# Altium PCB contor.PcbDoc
Units mm, origin at the board's own origin, x right, y up, seen from the top; angles counter-clockwise.
Board outline 151 x 86.38 mm, 2 copper layers (Top Layer, Bottom Layer); 14 components, 30 nets, 69 pads, 0 vias.
Unrouted connection lines stored in the file: 5.
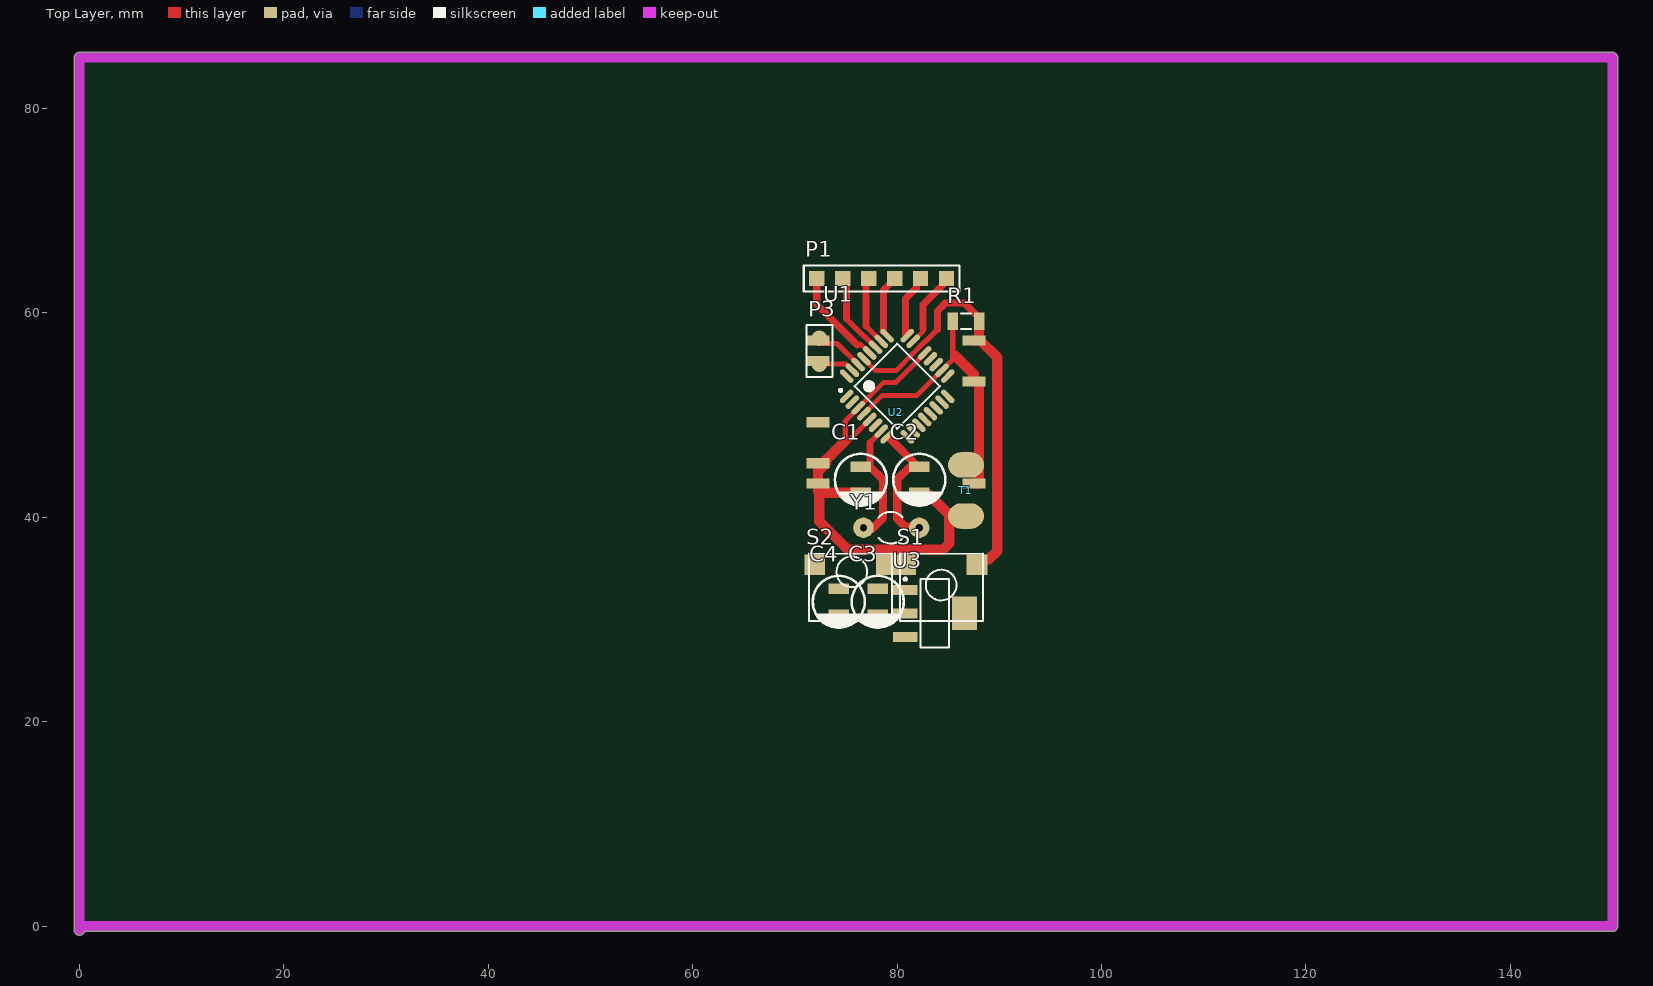
[diagram p0: Top Layer view]
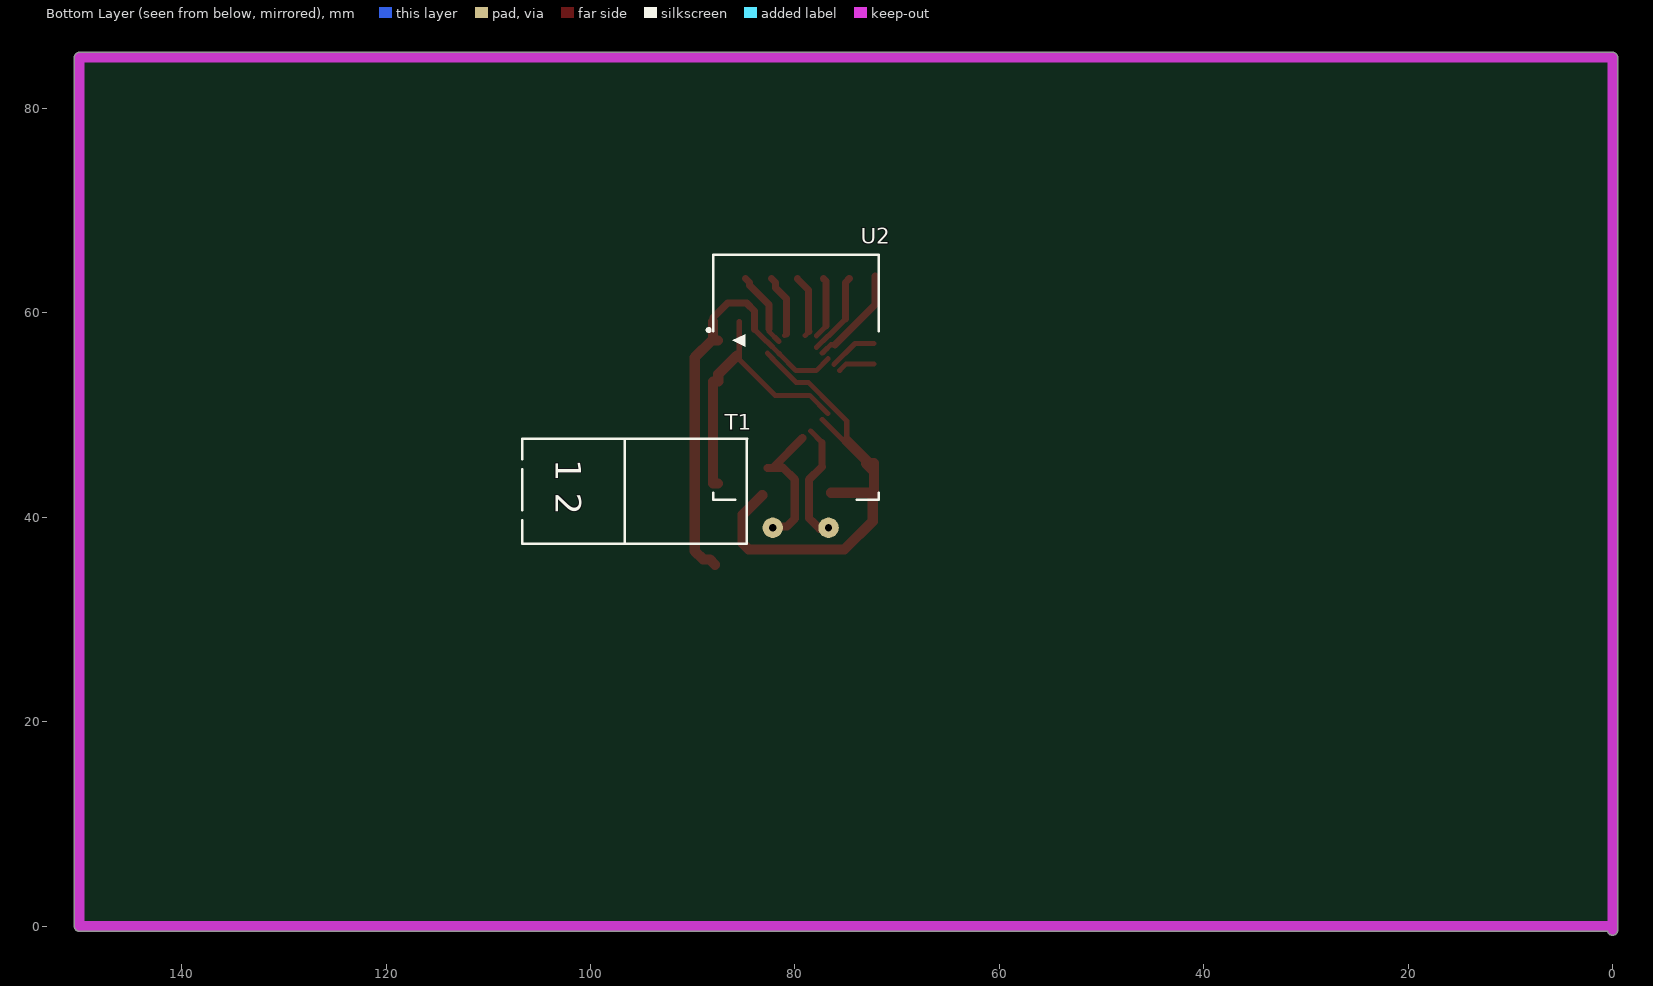
[diagram p1: Bottom Layer view, seen from below]
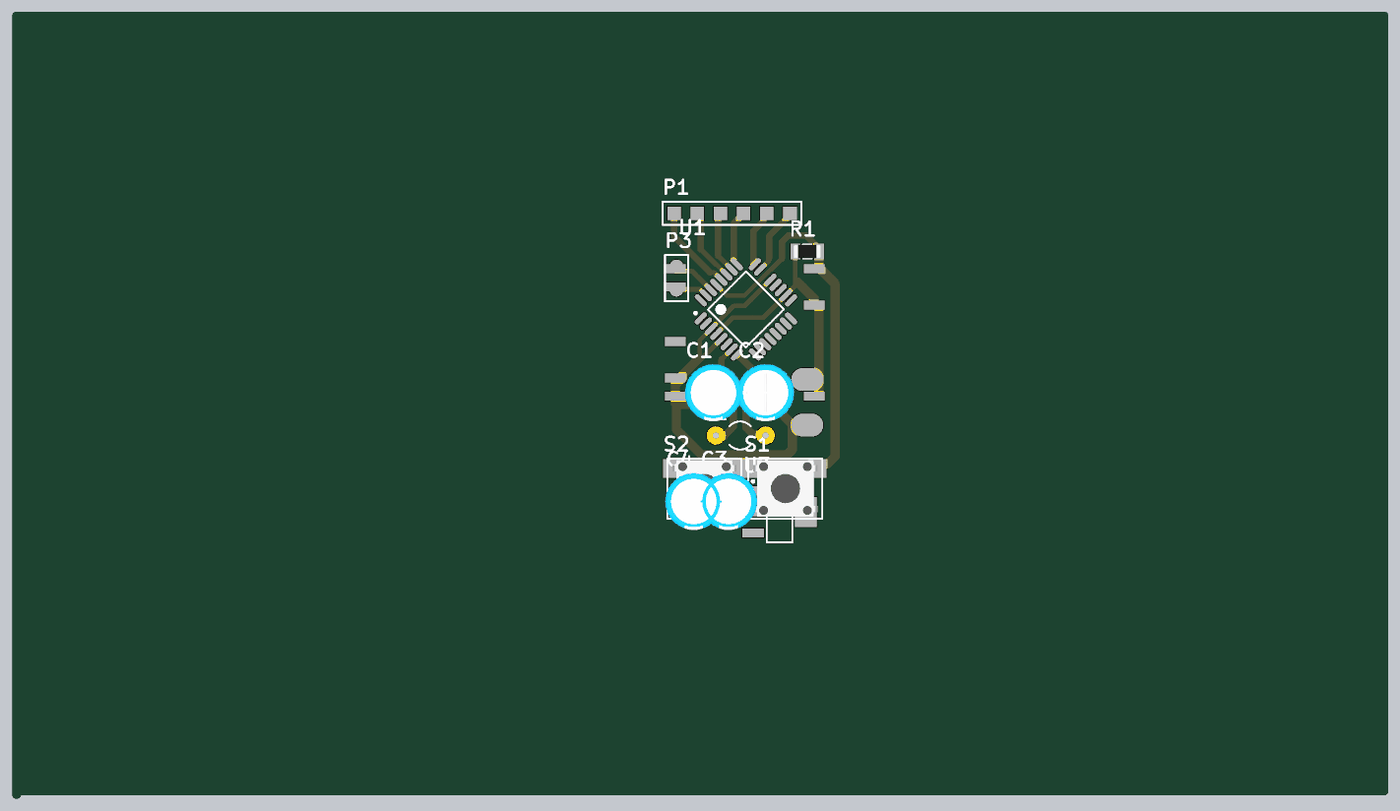
[diagram p2: 3D render of the assembled board from above, using the file's embedded part models]

## Layer stack, top to bottom
Top Solder: solder mask 0.0102, Solder Resist, Dk 3.5
Top Layer: signal copper 0.0356
Dielectric 1: dielectric 0.32, FR-4, Dk 4.8
Bottom Layer: signal copper 0.0356
Bottom Solder: solder mask 0.0102, Solder Resist, Dk 3.5

## Board outline
-0.5,-0.381 -0.5,85 cw(c0,85) 0,85.5 150,85.5 cw(c150,85) 150.5,85 150.5,0 cw(c150,0) 150,-0.5 0.486,-0.5 cw(c0,-0.381)

## Design rules (kind name [scope] priority, off if disabled: settings)
Clearance Clearance_1 [InPolygon] p1: gap=0.8 ignorepadtopadclearanceinfootprint=FALSE
Clearance [All] p2: gap=0.254 ignorepadtopadclearanceinfootprint=FALSE except(0: Arc-Hole Track-Hole SMDPad-Hole THPad-Hole Via-Hole Fill-Hole Poly-Hole Region-Hole Text-Hole)
DiffPairsRouting [All] p1: maxlimit=0.254 minlimit=0.8 mostfreqgap=0.254 toplayer_minwidth=0.381 toplayer_maxwidth=0.381 toplayer_prefwidth=0.381 bottomlayer_minwidth=0.381 bottomlayer_maxwidth=0.381 bottomlayer_prefwidth=0.381 maxuncoupledlength=12.7
PolygonConnect [All] p1: connectstyle=Relief reliefconductorwidth=0.254 reliefentries=4 polygonreliefangle="90 Angle" airgapwidth=0.254
RoomDefinition contor [InComponentClass('contor')] p1: confinementstyle=ConfineIn formatcopy=TRUE lockcomponents=FALSE outline 144.907,-4.953 247.904,-4.953 247.904,23.114 144.907,23.114
RoutingLayers [All] p1: top layer_v5=FALSE bottom layer_v5=TRUE
RoutingVias [All] p1: holewidth=0.711 width=2.5 viastyle="Through Hole" minholewidth=0.711 minwidth=1.27 maxholewidth=0.711 maxwidth=2
SolderMaskExpansion [All] p1: expansion=0.102 istentingtop=FALSE
Width [All] p1: maxlimit=3 minlimit=0.5 preferedwidth=1
28 further rules are at their usual default settings.

## Components (designator, comment, footprint, x,y, rotation, side; value= is the part's Value field where it differs from the comment)
C1 "=Value" ELEC-CAP-RAD10-20 76.454,43.688 r90 top
C2 "=Value" ELEC-CAP-RAD10-20 82.169,43.688 r90 top
C3 "=Value" ELEC-CAP-RAD10-20 78.105,31.75 r90 top (schematic designator C2)
C4 "=Value" ELEC-CAP-RAD10-20 74.295,31.75 r90 top (schematic designator C2)
P1 "Header 6" HDR1X6 84.836,63.373 r180 top
P3 "Header 2" HDR1X2 72.39,54.991 r90 top
R1 "10K" "RES 1206 (3216X08L)" 86.741,59.182 r180 top
S1 "PUSH BUTTON DOUBLE" "PUSH BUTTON" 84.328,33.147 r0 top
S2 "PUSH BUTTON DOUBLE" "PUSH BUTTON" 75.438,33.147 r0 top
T1 "Phoenix terminal" "phoenix terminal R 2" 106.68,47.705 r270 bottom
U1 "ATmega8-16AC" 32A_N 80.01,52.832 r45 top
U2 "ESP_12_E" ESP_12_E 87.888,57.307 r180 bottom
U3 "LM1117MP-3.3" MP04A_N 83.693,30.607 r0 top
Y1 "XTAL" R38 79.375,38.989 r270 top

## Footprints (in the part's own frame and the unit in brackets; to place one, negate y for a bottom-side part, rotate by r counter-clockwise, add the part's x,y. Pads: shape width x height; smd on the part's side, far side on the other; paste and mask are expansions set on the pad)
32A_N [mm] "Thin QFP, 32-Leads, Body 7x7mm, Pitch 0.8mm, IPC Medium Density"
  oval 1.65x0.55 smd: 1(-4.2,2.8) 2(-4.2,2) 3(-4.2,1.2) 4(-4.2,0.4) 5(-4.2,-0.4) 6(-4.2,-1.2) 7(-4.2,-2) 8(-4.2,-2.8) 17(4.2,-2.8) 18(4.2,-2) 19(4.2,-1.2) 20(4.2,-0.4) 21(4.2,0.4) 23(4.2,2) 24(4.2,2.8)
  oval 0.55x1.65 smd: 9(-2.8,-4.2) 10(-2,-4.2) 11(-1.2,-4.2) 12(-0.4,-4.2) 13(0.4,-4.2) 14(1.2,-4.2) 15(2,-4.2) 16(2.8,-4.2) 25(2.8,4.2) 26(2,4.2) 27(1.2,4.2) 28(0.4,4.2) 29(-0.4,4.2) 30(-1.2,4.2) 31(-2,4.2) 32(-2.8,4.2)
  silkscreen extent -4.32,-2.95 2.95,3.75, body extent -3.5,-3.5 3.5,3.5, height 1.2
ELEC-CAP-RAD10-20 [mm]
  rect 1x2 smd: 1(-1.27,0) 2(1.27,0)
  silkscreen extent -2.54,-2.54 2.54,2.54, body extent -3.15,-3.15 3.15,3.15, height 10.26
ESP_12_E [mm] "ESP-12 Wi-Fi Module by AI-Thinker"
  rect 2.25x1 smd far side: 1(0.375,0) 3(0.375,-4) 8(0.375,-14) 15(15.625,-14) 16(15.625,-12) 18(15.625,-8) 21(15.625,-2) 22(15.625,0)
  silkscreen extent -0.7,-15.57 16.08,8.37, body extent 0,-15.49 16,8.51, height 2.75
HDR1X2 [mm] "Connector; Header; 2 Position"
  round 1.5 smd: 1(0,0) 2(2.54,0)
  silkscreen extent -1.27,-1.27 3.81,1.27
HDR1X6 [mm] "Connector; Header; 6 Position"
  rect 1.5x1.5 smd: 1(0,0) 2(2.54,0) 3(5.08,0) 4(7.62,0) 5(10.16,0) 6(12.7,0)
  silkscreen extent -1.27,-1.27 13.97,1.27
MP04A_N [mm] "SOT223, 4-Leads, Body 6.5x3.5mm, Pitch 2.3mm, Lead Span 7mm, IPC Medium Density"
  rect 2.4x1 smd: 1(-2.9,2.3) 2(-2.9,0) 3(-2.9,-2.3)
  rect 2.4x3.3 smd: 4(2.9,0)
  silkscreen extent -3.02,-3.35 1.4,3.47, body extent -1.85,-3.35 1.85,3.35, height 1.8
"phoenix terminal R 2" [mm] "2 Right terminals"
  oval 2.5x3.5 smd far side: 1(2.573,19.939) 2(7.573,19.939)
  silkscreen extent 0,0 10.29,22
"PUSH BUTTON" [mil]
  rect 80x80 smd: 1(-137.5,87.5) 2(137.5,87.5)
  silkscreen extent -160,-130 160,130, body extent -155,-121 157,123, height 205
R38 [mm] "Crystal, Thru-Hole; 2 Leads; Body 3.1 x 8.2 mm (Dia.xH)"
  round 2 hole 0.7: 1(0,2.794) 2(0,-2.667)
  silkscreen extent -1.55,-1.19 1.55,1.17
"RES 1206 (3216X08L)" [mm] "Chip Resistor, 2-Leads, Body 3.2x1.6mm, IPC High Density _ (0.125 W)"
  rect 1.05x1.7 smd: 1(-1.295,0) 2(1.301,0)
  silkscreen extent -0.5,-0.75 0.5,0.75, body extent -1.52,-0.76 1.53,0.76, height 0.6

## Part data
C1 C2 C3 C4: library part "Capacitor Electrolytic", "Electrolytic Capacitor"
P1: "Header, 6-Pin", LatestRevisionDate=17-Jul-2002, LatestRevisionNote="Re-released for DXP Platform.", Publisher="Altium Limited"
P3: "Header, 2-Pin", LatestRevisionDate=17-Jul-2002, LatestRevisionNote="Re-released for DXP Platform.", Publisher="Altium Limited"
R1: library part Resistor, "Resistor", Power="1/4 W", Tolerance=5%
S1 S2: "Switch"
T1: library part "Phoenix terminal R 2", "Right Terminal 2 Pin", ComponentLinkURL=www.picpars.com, Designer="Seyed Mohsen Ghasemain", E-mail=picpars@gmail.com
U1: "8-Bit AVR Microcontroller with 8K Bytes of In-System Programmable Flash Memory", Supplier Part Number 1=ATMEGA8-16AC-ND, Code_JEDEC=MS-026-ABA, ComponentLink1Description=Datasheet, ComponentLink1URL=http://www.atmel.com/dyn/resources/prod_documents/doc2486.pdf, ComponentLink2Description="Atmel.com Home", ComponentLink2URL=http://www.atmel.com, DatasheetVersion=2486H-AVR-09/02, LatestRevisionDate=16-Oct-2006, LatestRevisionNote="IPC-7351 Footprint Added.", PackageDescription="32-Lead, 7x7x1.0 mm Body, 0.8mm Lead Pitch, Thin Profile Plastic Quad Flat Package (TQFP)", PackageReference=32A, PackageVersion="revB, Oct-2001", Published=17-Sep-2003, Publisher="Altium Limited", Supplier 1=Digi-Key, Supplier 2=Mouser, Supplier Part Number 2=556-ATMEGA8-16AC
U2: "ESP-12 Wi-Fi Module by AI-Thinker", IC=ESP8266-EX, Vendor=Ai-thinker
U3: "800mA Low-Dropout Linear Regulator", DigiKeyPartNumber=LM1117MP-3.3CT-ND, Manufacturer="National Semiconductor", PackageTopMarking=XYTT*N05A, PowerWise=N, Code_IPC=SOT223-4, Code_JEDEC=TO-261-AA, ComponentLink1Description="LM1117 Datasheet", ComponentLink1URL=http://www.national.com/ds/LM/LM1117.pdf, ComponentLink2Description="LM1117 Web Page", ComponentLink2URL=http://www.national.com/pf/LM/LM1117.html, ComponentLink3Description="MP04A Package Page", ComponentLink3URL=http://www.national.com/packaging/folders/mp04a.html, CompType="LDO IC", DatasheetVersion=Apr-2006, PackageDescription="Molded SOT-223, 6.50 x 3.56 x 1.6mm Body, 4 Lead, 2.3mm Pitch", PackageReference=MP04A, PackageVersion="revB, Apr-2003", PartNumber=LM1117MP-3.3, PinCount=4, Published=4-Dec-2008, Publisher="Altium Limited", RoHS=O
Y1: "Crystal Oscillator", LatestRevisionDate=17-Jul-2002, LatestRevisionNote="Re-released for DXP Platform.", PackageDescription="Crystal, Thru-Hole; 2 Leads; Body 3.1 x 8.2 mm (Dia.xH)", PackageReference=R38, Published=8-Jun-2000, Publisher="Altium Limited"

## Nets (pads, with @x,y where several pads share a name; then routed paths per layer and width w, separated by ;. In a path a pad name is that pad's centre, name@x,y a point inside that pad or via, vN(x,y) a via of type N, cw(c..) or ccw(c..) an arc to the next point about the centre after c; other vN are vias at no path point)
5v: U3.3
ADC: 
btn: S2.1 U2.18
GND: C1.1 C2.1 S1.1 S2.2 T1.2 U1.3 U1.5 U1.21 U2.15 U2.16 U3.1 | length 50.4
  Top Layer w0.5: U1.5 75.086,47.342 74.93,47.186 74.93,47.498 74.93,49.436 76.192,50.697 U1.3 78.694,53.213 79.883,53.213 82.095,55.425 82.095,55.453 82.283,55.641 82.283,55.657 82.697,56.071 U1.21
  Top Layer w1: U2.16@73.051,45.307 72.673,44.913 72.263,44.486 ; 74.93,47.498 72.888,45.456 72.888,45.307 U2.16 72.263,44.913 72.263,44.486 ; C1.1 72.39,42.418 ; 83.185,42.164 85.1,40.249 85.1,37.446 84.514,36.86 75.154,36.86 72.39,39.624 72.39,42.418 ; 72.263,44.486 72.263,44.196 U2.15 72.263,42.545 72.39,42.418
i2: P1.3 U1.25 | length 6.2
  Top Layer w0.5: U1.25@78.641,58.194 78.641,58.161 U1.25
  Top Layer w0.7: U1.25@78.641,58.194 78.683,58.236 78.683,62.243 79.756,63.316 P1.3
i3: P1.4 U1.26 | length 6.1
  Top Layer w0.5: 76.962,58.708 U1.26@77.898,57.773
  Top Layer w0.7: 76.962,58.708 76.962,63.119 P1.4
i4: P1.5 U1.27 | length 8.1
  Top Layer w0.5: 75.057,59.436 75.057,59.406 76.707,57.756 76.77,57.756 77.875,56.65 U1.27
  Top Layer w0.7: P1.5 75.057,62.992 75.057,59.436
i5: P1.6 U1.28 | length 9.9
  Top Layer w0.5: 76.073,56.896 76.482,56.896 76.879,56.499 76.896,56.499 77.309,56.085 U1.28
  Top Layer w0.7: P1.6@72.136,63.613 72.136,60.833 76.073,56.896
i6: P1.1 U1.23 | length 7.5
  Top Layer w0.5: U1.23 82.55,58.2 82.55,58.42
  Top Layer w0.7: 82.55,58.42 82.55,60.833 84.436,62.719 84.436,62.973 P1.1
i9: 
i11: 
i12: 
i13: 
NetC1_2: C1.2 U1.7 Y1.2 | length 11.4
  Top Layer w0.5: Y1.2@77.216,38.862 Y1.2@77.597,38.862 ; 77.343,47.337 U1.7
  Top Layer w0.7: C1.2@77.343,44.958 77.343,47.337
  Top Layer w0.8: C1.2@77.343,44.958 77.443,44.858 78.613,43.688 78.613,39.914 78.144,39.445 78.124,39.445 77.597,38.918 Y1.2@77.597,38.862
NetC2_2: C2.2 U1.8 Y1.1 | length 14
  Top Layer w0.8: U1.8@79.248,47.752 82.069,44.931 82.077,44.931 82.169,44.839 82.169,44.831 C2.2@82.677,44.831 ; C2.2@82.169,44.858 81.18,44.858 80.01,43.688 80.01,39.878 80.778,39.11 82.429,39.11 Y1.1@82.556,38.983
O1: U1.2
O2: U1.9
O3: U1.10
o4: U1.11
o5: U1.12
o6: U1.13
o7: U1.14
o8: U1.15
o9: U1.16
o10: U1.17
o11: P1.2 U1.24 | length 6.3
  Top Layer w0.5: U1.24@80.821,57.961 80.998,57.783 U1.24
  Top Layer w0.7: U1.24@80.821,57.961 80.821,61.39 81.896,62.465 81.896,62.973 P1.2
rst: R1.1 S1.2 U1.29 U2.1 | length 42.7
  Top Layer w0.5: U1.29 77.92,54.356 79.883,54.356 81.529,56.002 81.529,56.018 82.73,57.219 82.777,57.219 83.947,58.39 ; R1.1@88.011,59.157 R1.1@88.011,59.532
  Top Layer w0.7: 83.947,58.39 83.947,60.198 84.709,60.96 86.583,60.96 R1.1@88.011,59.532
  Top Layer w1: U2.1 88.138,57.307 89.789,55.656 89.789,36.703 88.971,35.885 88.336,35.885 S1.2 ; U2.1@88.011,57.404 R1.1@88.011,59.157
rx: U1.31 U2.21 | length 3.6
  Top Layer w0.5: U2.21@72.253,55.023 74.977,55.023 75.612,54.388 U1.31
rx2: U1.30 U2.22 | length 4.8
  Top Layer w0.5: U2.22@72.253,57.023 74.122,57.023 U1.30
vdd: R1.2 T1.1 U1.4 U1.6 U1.18 U2.3 U2.8 U3.2 U3.4 | length 29.1
  Top Layer w0.5: U1.4 78.555,51.943 81.949,51.943 U1.18 85.598,55.592 ; 85.44,55.499 R1.2
  Top Layer w1: 85.677,55.832 87.503,54.006 U2.3@87.503,53.307 ; U2.8 88.011,43.307 88.011,53.307 U2.3
pads on no net: C3.1 C3.2 C4.1 C4.2 P3.1 P3.2 U1.1 U1.19 U1.20 U1.32

## Keep-outs
Keep-Out Layer:
  lines w1: 0,-0.381 0,85 150,85 150,0 0,0

## Text inside footprints (layer, text, board x,y; h text height)
T1: Bottom Overlay "1 2" at 103.378,45.673 h2.5 r90
U2: Mechanical 13 "CUTOUT POLYGON" at 87.761,64.673 h0.25; Mechanical 13 "ANTENNA AREA" at 87.761,65.181 h0.25